# EAGLE board bottomboard (EAGLE 7.1.0)
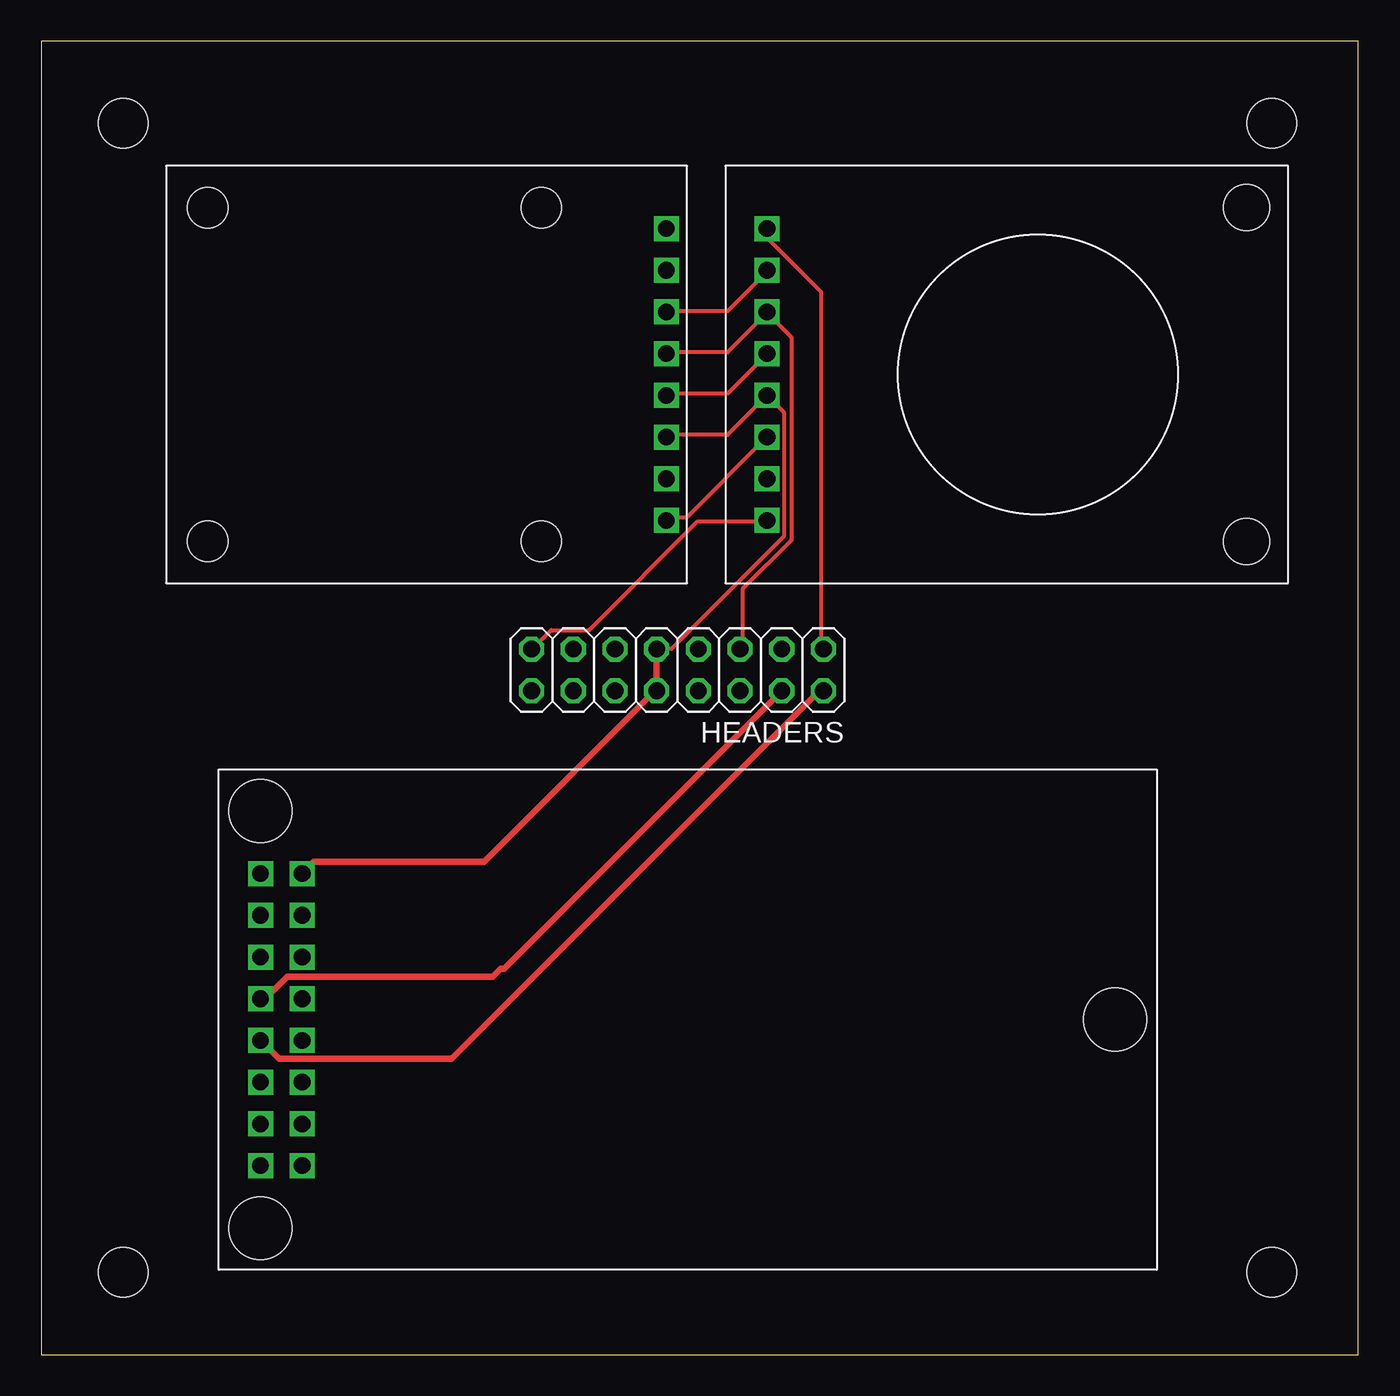
[diagram p0: board, top side]
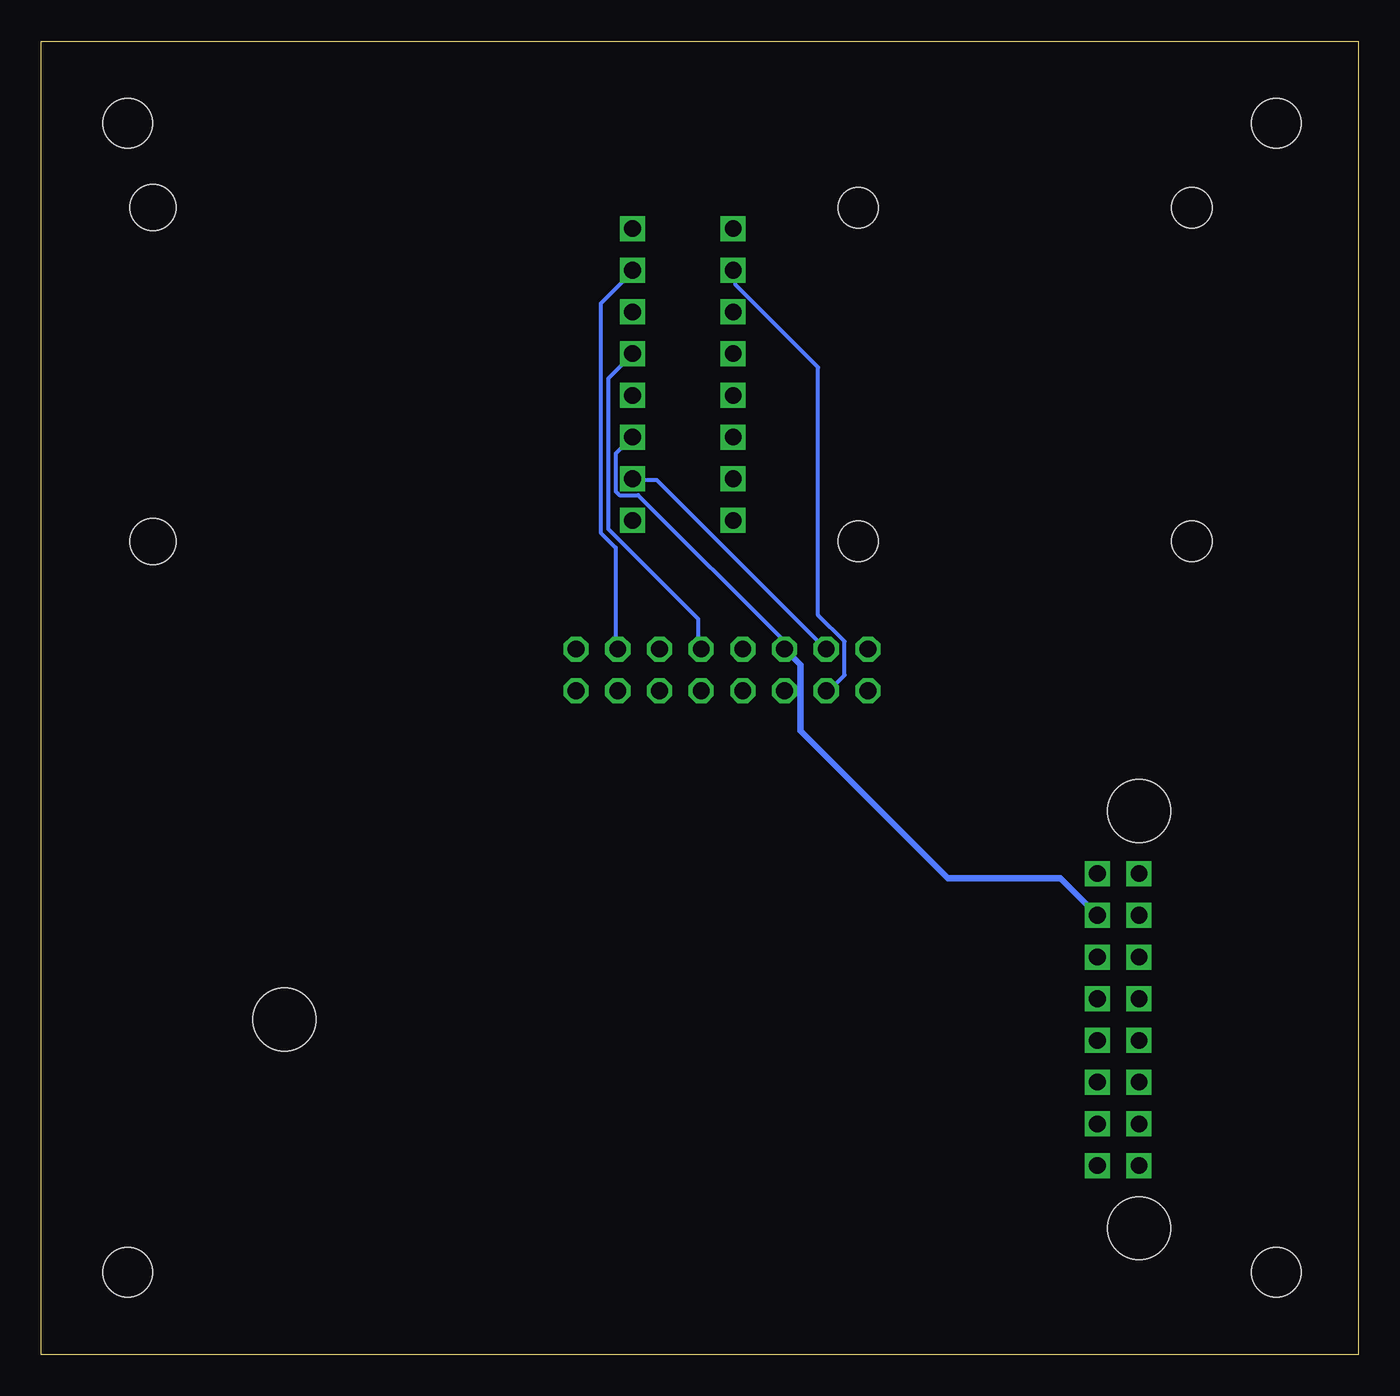
[diagram p1: board, bottom side, seen from below]

Size 80.27 x 80 mm. Coordinates in mm from the lower left corner, seen from the top.
Outline: 0,0 80.27,0 80.27,80 0,80 0,0
Copper layers (1*16): Top 0.035mm / dielectric 1.5mm / Bottom 0.035mm
Design rules "default": minimum track width 10mil, minimum drill 24mil, track to track 8mil, track to pad 8mil, pad to pad 8mil, via to via 8mil, smd to smd 8mil, copper to edge 40mil, drill to drill 8mil, minimum pad ring 10mil, minimum via ring 8mil, stop-mask expansion 4mil, vias tented up to drill 0mil, thermal gap 10mil
Holes 3 mm at 5,75 75,75 75,5 5,5

## Footprints (pad centres in the part's own frame; a part is rotated, then mirrored left to right if it is on the bottom)
2X08 = drill 1.016 octagon: 1 -8.89,-1.27; 2 -8.89,1.27; 3 -6.35,-1.27; 4 -6.35,1.27; 5 -3.81,-1.27; 6 -3.81,1.27; 7 -1.27,-1.27; 8 -1.27,1.27; 9 1.27,-1.27; 10 1.27,1.27; 11 3.81,-1.27; 12 3.81,1.27; 13 6.35,-1.27; 14 6.35,1.27; 15 8.89,-1.27; 16 8.89,1.27
COMMS = drill 1.016 square: 5V -5.08,0; CTS -7.62,0; GND -7.62,2.54; GND_2 -5.08,2.54; GND_3 -5.08,-15.24; P0.1 -7.62,-12.7; P2.0 -5.08,-12.7; P2.1 -5.08,-10.16; P2.2 -5.08,-7.62; P2.3 -5.08,-5.08; P2.6 -7.62,-15.24; RTS -7.62,-10.16; RX -7.62,-5.08; TX -7.62,-7.62; VUSB -7.62,-2.54; VUSB_2 -5.08,-2.54 | hole 3.81: -7.62,6.35; -7.62,-19.05; 44.45,-6.35
SDCARD = drill 1.016 square: 3V 30.48,6.35; 5V 30.48,3.81; CD 30.48,21.59; CLK 30.48,11.43; CS 30.48,19.05; DI 30.48,16.51; DO 30.48,13.97; GND 30.48,8.89 | hole 2.449: 2.54,22.86; 22.86,2.54; 22.86,22.86 | hole 2.46: 2.54,2.54
ARDUCAM = drill 1.016 square: 5V 2.54,7.62; CS 2.54,20.32; GND 2.54,10.16; MISO 2.54,15.24; MOSI 2.54,17.78; SCL 2.54,2.54; SCLK 2.54,12.7; SDA 2.54,5.08 | hole 2.8: 31.75,21.59; 31.75,1.27

## Placement (x,y rotation side)
HEADERS  [2X08]  38.78,41.7 180 top
U$1  COMMS  [COMMS]  20.99,26.75 0 top
U$2  SDCARD  [SDCARD]  7.62,46.99 0 top
U$3  ARDUCAM  [ARDUCAM]  41.69,48.26 0 top

## Library data of the parts
HEADERS = pinhead
U$1 = comms
U$2 = sdcard
U$3 = arducam

## Nets
5V: HEADERS.11 U$1.5V U$2.5V U$3.5V
CLK: HEADERS.7 U$2.CLK U$3.SCLK
GND: HEADERS.9 U$1.GND_2 U$2.GND U$3.GND
MISO: HEADERS.5 U$2.DO U$3.MISO
MOSI: HEADERS.3 U$2.DI U$3.MOSI
N$1: HEADERS.1 U$3.CS
N$2: HEADERS.14 U$2.CS
N$3: HEADERS.2 U$1.TX
N$6: HEADERS.4 U$1.RX
N$7: HEADERS.13 U$3.SDA
N$8: HEADERS.15 U$3.SCL

## Tracks (layer width: path | path; a pad name or v marks a point on that pad's centre or on a via)
5V
  Top 0.254: U$2.5V 38.18,50.98 39.32,50.98 44.12,55.78 U$3.5V
  Bottom 0.254: HEADERS.11 34.98,43.43 43.89,52.35 45.03,52.35 45.26,52.58 45.26,54.86 44.35,55.78 U$3.5V
  Bottom 0.406: HEADERS.11 34,42 34,38 25,29 18.16,29 U$1.5V
CLK
  Top 0.254: U$2.CLK 38.18,58.52 41.83,58.52 44.12,60.81 U$3.SCLK
  Bottom 0.254: HEADERS.7 40.23,42.98 40.23,44.81 45.72,50.29 45.72,59.44 44.35,60.81 U$3.SCLK
GND
  Top 0.254: U$2.GND 38.18,56.01 41.83,56.01 44.12,58.29 U$3.GND 44.35,58.29 45.26,57.38 45.26,49.84 38.41,42.98 37.72,42.98 HEADERS.9
  Top 0.406: HEADERS.9 37.51,40.51 27,30 16.62,30 U$1.GND_2
MISO
  Top 0.254: U$2.DO 38.18,61.04 41.83,61.04 44.12,63.32 U$3.MISO 44.35,63.32 45.72,61.95 45.72,49.61 42.75,46.63 42.75,42.98 HEADERS.5
MOSI
  Top 0.254: U$2.DI 38.18,63.55 41.83,63.55 44.12,65.84 U$3.MOSI
  Bottom 0.254: HEADERS.3 45.26,42.98 45.26,49.15 46.18,50.06 46.18,64.01 44.35,65.84 U$3.MOSI
N$1
  Top 0.254: U$3.CS 44.35,68.58 44.35,67.89 47.55,64.69 47.55,42.98 HEADERS.1
N$2
  Bottom 0.254: U$2.CS 37.95,65.84 37.95,65.15 32.92,60.12 32.92,45.03 31.32,43.43 31.32,41.38 32.23,40.46 HEADERS.14
N$3
  Top 0.406: HEADERS.2 47.43,40.43 25,18 14.5,18 U$1.TX
N$6
  Top 0.406: U$1.RX 13.67,21.67 15,23 27.5,23 28,23.5 28.2,23.5 HEADERS.4
N$7
  Bottom 0.254: U$3.SDA 44.12,53.26 42.75,53.26 32.46,42.98 HEADERS.13
N$8
  Top 0.254: U$3.SCL 44.12,50.75 40.01,50.75 33.38,44.12 31.09,44.12 29.95,42.98 HEADERS.15